# Altium PCB Copy of UniversalBoard.PcbDoc (part 1 of 2)
Units mm, origin at the board's own origin, x right, y up, seen from the top; angles counter-clockwise.
Board outline 150 x 100 mm, 2 copper layers (Top Layer, Bottom Layer); 74 components, 82 nets, 428 pads, 86 vias.
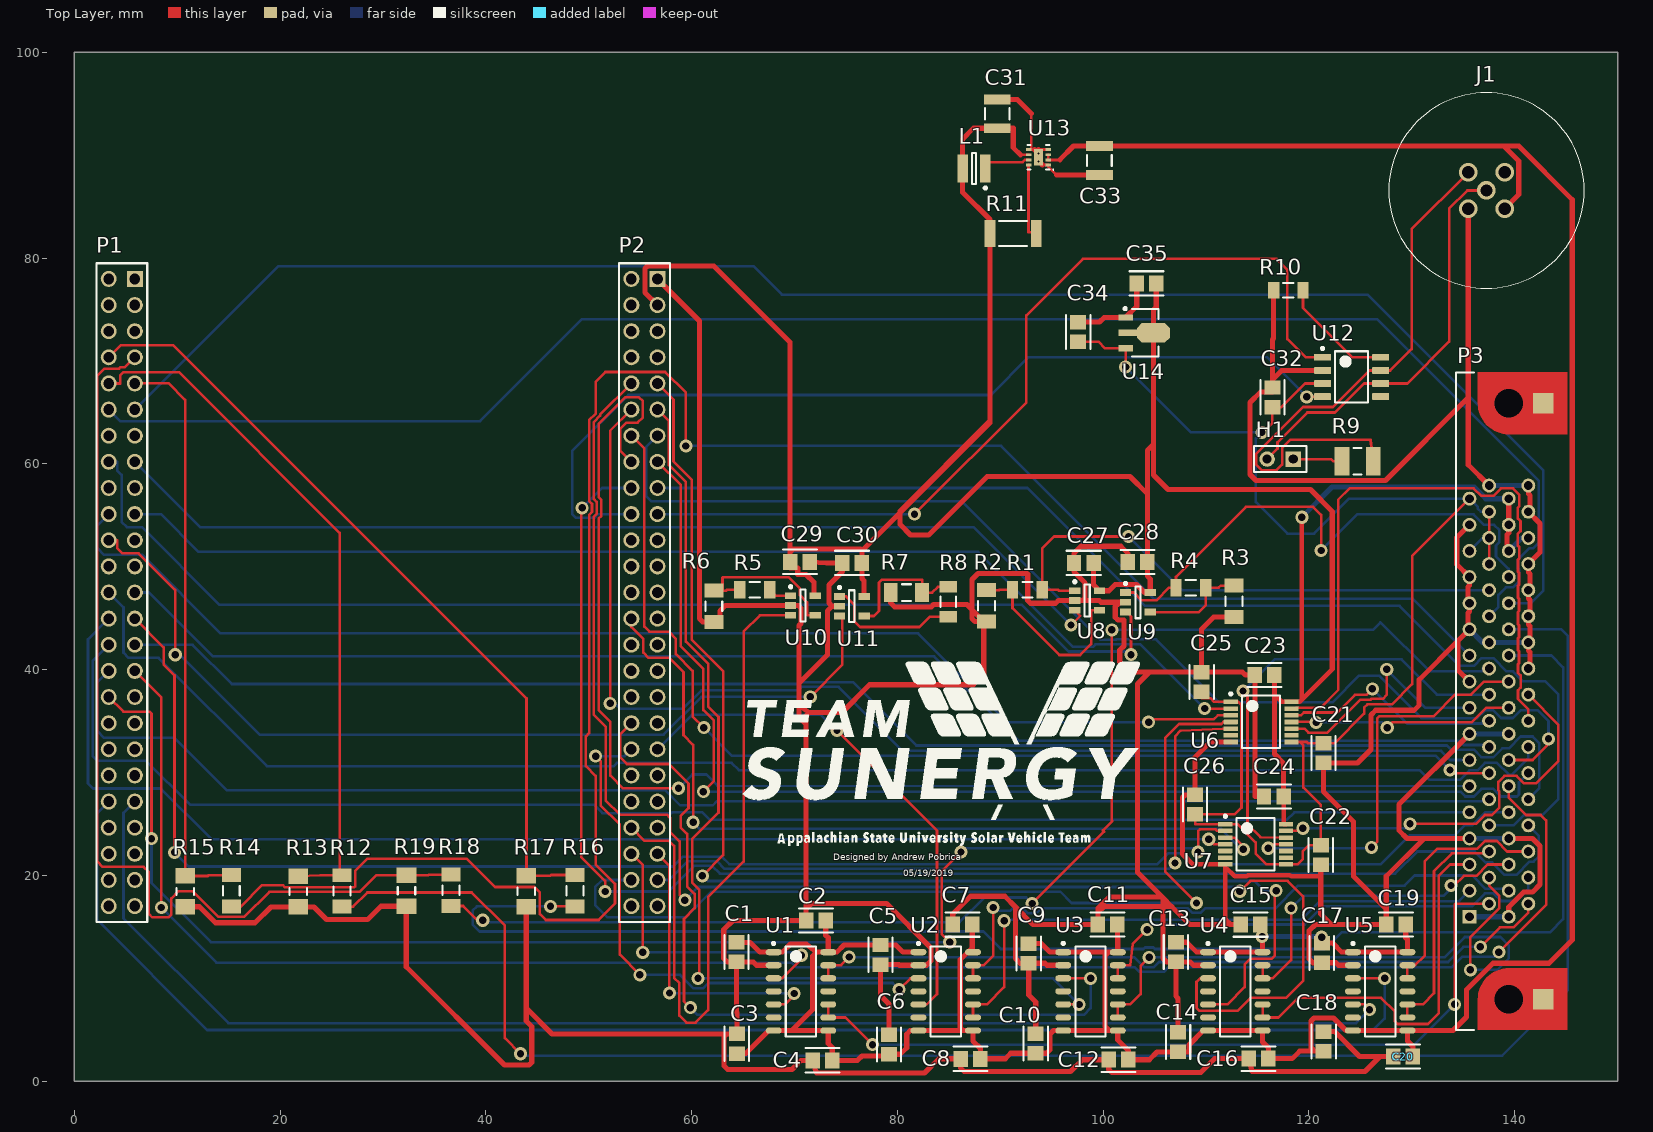
[diagram p0: Top Layer view]
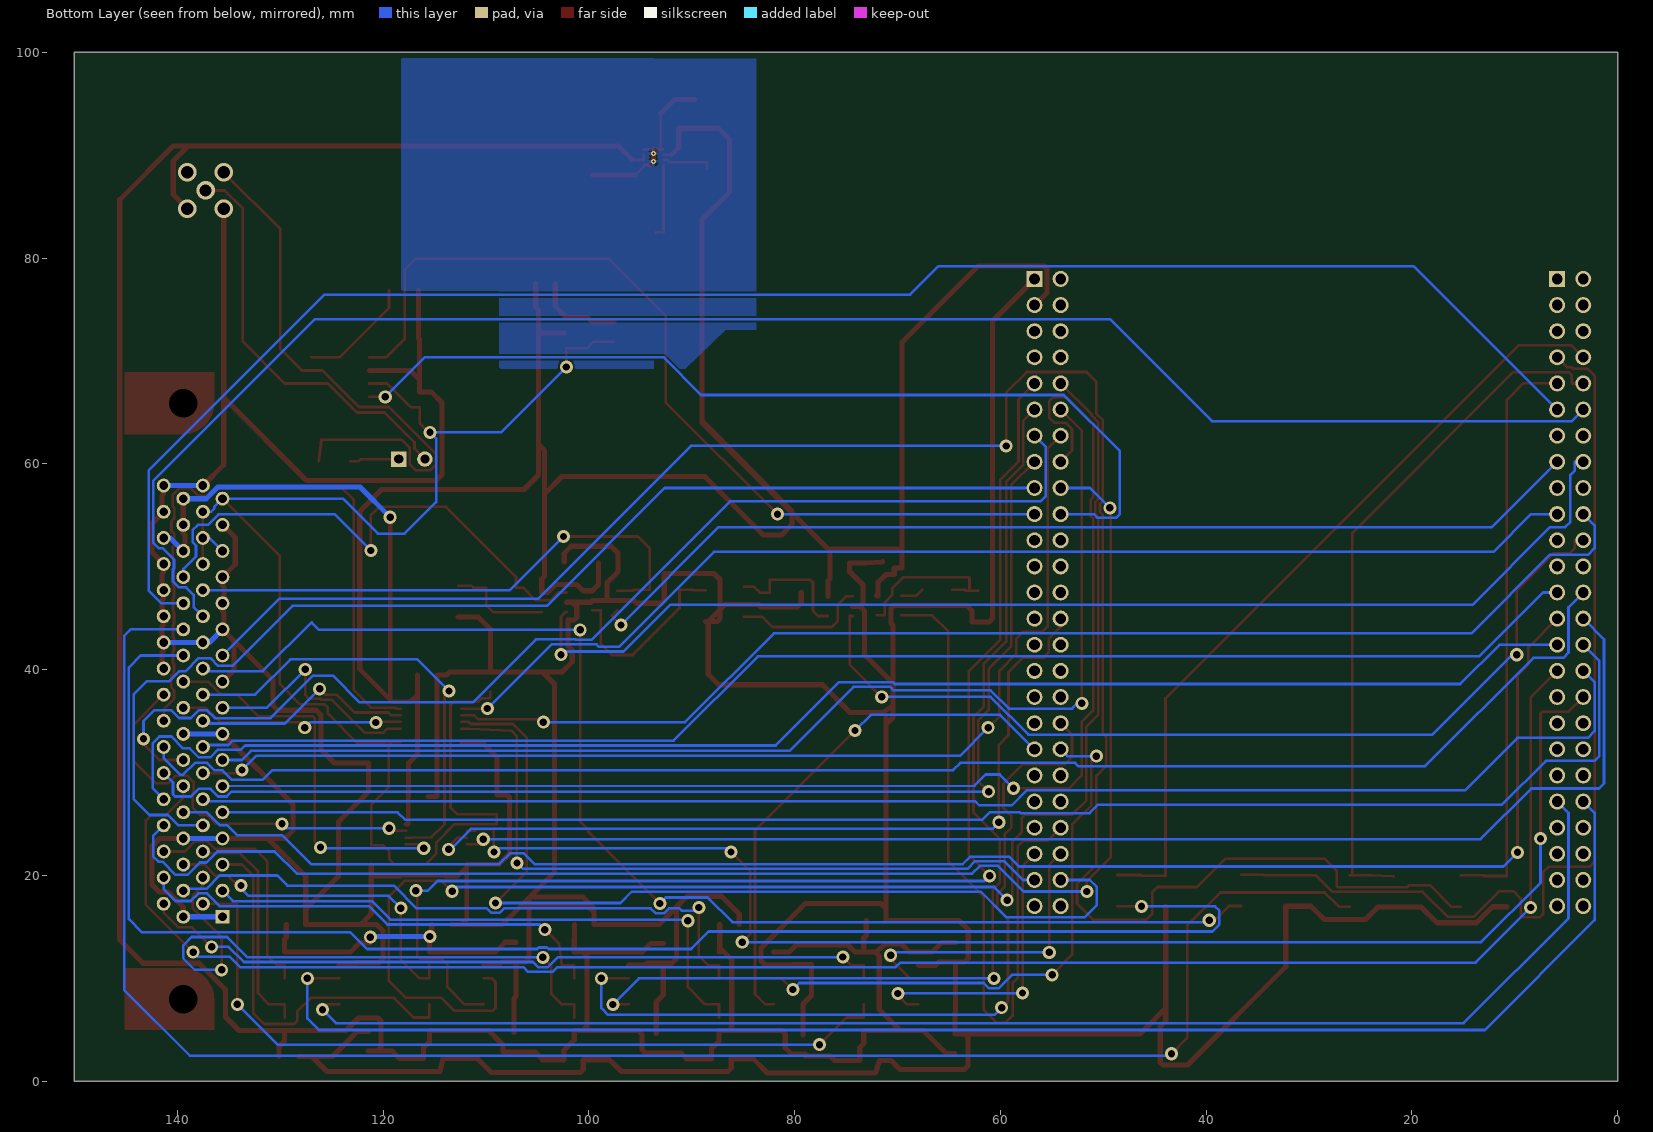
[diagram p1: Bottom Layer view, seen from below]

## Layer stack, top to bottom
Top Solder: solder mask 0.0102, Solder Resist, Dk 3.5
Top Layer: signal copper 0.0356
Dielectric 1: dielectric 0.32, FR-4, Dk 4.8
Bottom Layer: signal copper 0.0356
Bottom Solder: solder mask 0.0102, Solder Resist, Dk 3.5

## Board outline
0,0 150,0 150,100 0,100

## Design rules (kind name [scope] priority, off if disabled: settings)
Clearance "Stitching No Net_1" [IsStitchingVia and InNet('No Net') vs (IsVia and (Not IsStitchingVia)) Or IsPad] p1: gap=0.127 ignorepadtopadclearanceinfootprint=FALSE
Clearance "Stitching No Net" [IsStitchingVia and InNet('No Net') vs (IsVia and (Not IsStitchingVia)) Or IsPad] p2: gap=0.127 ignorepadtopadclearanceinfootprint=FALSE
Clearance [All] p3: gap=0.2 ignorepadtopadclearanceinfootprint=FALSE except(0: Arc-Hole Track-Hole SMDPad-Hole THPad-Hole Via-Hole Fill-Hole Poly-Hole Region-Hole Text-Hole)
ComponentClearance [All] p1: gap=0.2 collisioncheckmode=3 verticalgap=0.2 showdistances=FALSE
DiffPairsRouting [All] p1: maxlimit=0.2 minlimit=0.2 mostfreqgap=0.2 toplayer_minwidth=0.381 toplayer_maxwidth=0.381 toplayer_prefwidth=0.381 bottomlayer_minwidth=0.381 bottomlayer_maxwidth=0.381 bottomlayer_prefwidth=0.381 maxuncoupledlength=12.7
HoleSize [All] p1: absolutevalues=TRUE maxlimit=2.75 minlimit=0.025 maxpercent=80.000 minpercent=20.000
MinimumSolderMaskSliver [All] p1: minsoldermaskwidth=0.1
PolygonConnect [All] p1: connectstyle=Relief reliefconductorwidth=0.254 reliefentries=4 polygonreliefangle="90 Angle" airgapwidth=0.254
RoomDefinition Power_CAN [InComponentClass('Power_CAN')] p1: confinementstyle=ConfineIn formatcopy=TRUE lockcomponents=FALSE outline 82.24,57.23 152.35,57.23 152.35,101.48 82.24,101.48
RoomDefinition output_header [InComponentClass('output_header')] p2: confinementstyle=ConfineIn formatcopy=TRUE lockcomponents=FALSE outline 151.98,70.26 133.95,70.26 133.95,3.31 151.98,3.31
RoomDefinition DAC_PWW_Outputs [InComponentClass('DAC_PWW_Outputs')] p3: confinementstyle=ConfineIn formatcopy=TRUE lockcomponents=FALSE outline 59.5,41.2 130.694,41.2 130.694,54.53 59.5,54.53
RoomDefinition Analog_inputs [InComponentClass('Analog_inputs')] p4: confinementstyle=ConfineIn formatcopy=TRUE lockcomponents=FALSE outline 7.42,15.61 52.75,15.61 52.75,23.98 7.42,23.98
RoomDefinition 12vOutputs [InComponentClass('12vOutputs')] p5: confinementstyle=ConfineIn formatcopy=TRUE lockcomponents=FALSE outline 62.78,0.32 133.42,0.32 133.42,18.577 62.78,18.577
RoomDefinition 5vOutputs [InComponentClass('5vOutputs')] p6: confinementstyle=ConfineIn formatcopy=TRUE lockcomponents=FALSE outline 104.92,19.5 127.25,19.5 127.25,41.19 104.92,41.19
RoutingVias [All] p1: holewidth=0.711 width=1.27 viastyle="Through Hole" minholewidth=0.711 minwidth=1.27 maxholewidth=0.711 maxwidth=1.27
SMDNeckDown [(InNet('+5') OR InNet('+12') OR InNet('GND'))] p1: percent=100.000
SilkToSilkClearance [All] p1: silktosilkclearance=0.2
SilkToSolderMaskClearance [IsPad] p1: minsilkscreentomaskgap=0.2 clearancetoexposedcopper=TRUE
SolderMaskExpansion [All] p1: expansion=0.102
Width 12V [InNet('+12')] p1: maxlimit=0.5 minlimit=0.254 preferedwidth=0.5 minimp=50.000000 maximp=50.000000 favimp=50.000000
Width 5V [InNet('+5')] p2: maxlimit=0.5 minlimit=0.254 preferedwidth=0.5 minimp=50.000000 maximp=50.000000 favimp=50.000000
Width GND [InNet('GND')] p3: maxlimit=0.5 minlimit=0.254 preferedwidth=0.5 minimp=50.000000 maximp=50.000000 favimp=50.000000
Width All [All] p4: maxlimit=0.254 minlimit=0.254 preferedwidth=0.254
24 further rules are at their usual default settings.

## Classes and differential pairs
component class Power_CAN: C31 C32 C33 C34 C35 C? H1 H? J1 J? L1 L? R9 R10 R11 U12 U13 U14
component class output_header: P3 P?
component class DAC_PWW_Outputs: C27 C28 C29 C30 C? R1 R2 R3 R4 R5 R6 R7 R8 U8 U9 U10 U11
component class Analog_inputs: R12 R13 R14 R15 R16 R17 R18 R19
component class 12vOutputs: C1 C2 C3 C4 C5 C6 C7 C8 C9 C10 C11 C12 C13 C14 C15 C16 C17 C18 C19 C20 U1 U2 U3 U4 U5
component class 5vOutputs: C21 C22 C23 C24 C25 C26 C? U6 U7

## Components (designator, comment, footprint, x,y, rotation, side; value= is the part's Value field where it differs from the comment)
C1 "C0603C104K5RACTU" Kemet_C0805_IPC_A 64.35,12.54 r270 top
C2 "C0603C104K5RACTU" Kemet_C0805_IPC_A 72.08,15.62 r180 top
C3 "C0603C104K5RACTU" Kemet_C0805_IPC_A 64.39,3.641 r90 top
C4 "C0603C104K5RACTU" Kemet_C0805_IPC_A 72.71,2.03 r180 top
C5 "C0603C104K5RACTU" Kemet_C0805_IPC_A 78.35,12.29 r270 top
C6 "C0603C104K5RACTU" Kemet_C0805_IPC_A 79.18,3.57 r90 top
C7 "C0603C104K5RACTU" Kemet_C0805_IPC_A 86.32,15.22 r180 top
C8 "C0603C104K5RACTU" Kemet_C0805_IPC_A 87.11,2.18 r180 top
C9 "C0603C104K5RACTU" Kemet_C0805_IPC_A 92.76,12.42 r270 top
C10 "C0603C104K5RACTU" Kemet_C0805_IPC_A 93.44,3.67 r90 top
C11 "C0603C104K5RACTU" Kemet_C0805_IPC_A 100.43,15.24 r180 top
C12 "C0603C104K5RACTU" Kemet_C0805_IPC_A 101.49,2.09 r180 top
C13 "C0603C104K5RACTU" Kemet_C0805_IPC_A 107.06,12.55 r270 top
C14 "C0603C104K5RACTU" Kemet_C0805_IPC_A 107.28,3.8 r90 top
C15 "C0603C104K5RACTU" Kemet_C0805_IPC_A 114.31,15.22 r180 top
C16 "C0603C104K5RACTU" Kemet_C0805_IPC_A 115.11,2.19 r180 top
C17 "C0603C104K5RACTU" Kemet_C0805_IPC_A 121.25,12.47 r270 top
C18 "C0603C104K5RACTU" Kemet_C0805_IPC_A 121.43,3.87 r90 top
C19 "C0603C104K5RACTU" Kemet_C0805_IPC_A 128.46,15.24 r180 top
C20 "C0603C104K5RACTU" Kemet_C0805_IPC_A 129.15,2.4 r180 top
C21 "C0603C104K5RACTU" Kemet_C0805_IPC_A 121.41,31.89 r270 top
C22 "C0603C104K5RACTU" Kemet_C0805_IPC_A 121.15,21.97 r270 top
C23 "C0603C104K5RACTU" Kemet_C0805_IPC_A 115.69,39.473 r180 top
C24 "C0603C104K5RACTU" Kemet_C0805_IPC_A 116.58,27.67 r180 top
C25 "C0603C104K5RACTU" Kemet_C0805_IPC_A 109.57,38.82 r90 top
C26 "C0603C104K5RACTU" Kemet_C0805_IPC_A 108.93,26.88 r90 top
C27 "C0603C104K5RACTU" Kemet_C0805_IPC_A 98.11,50.38 r180 top
C28 "C0603C104K5RACTU" Kemet_C0805_IPC_A 103.34,50.46 r180 top
C29 "C0603C104K5RACTU" Kemet_C0805_IPC_A 70.517,50.483 r180 top
C30 "C0603C104K5RACTU" Kemet_C0805_IPC_A 75.601,50.38 r180 top
C31 "CAP 22uF 16V X7R 1210(3225)" CAPC1210(3225)280_L 89.7,94.02 r90 top value=22uF
C32 "C0603C104K5RACTU" Kemet_C0805_IPC_A 116.447,66.477 r90 top
C33 "CAP 22uF 16V X7R 1210(3225)" CAPC1210(3225)280_L 99.63,89.49 r270 top value=22uF
C34 "C0805C105K4RACTU" Kemet_C0805_IPC_A 97.57,72.83 r270 top
C35 "C0805C105K4RACTU" Kemet_C0805_IPC_A 104.207,77.547 r0 top
H1 "Header 0" HDR1X2 118.47,60.47 r180 top
J1 "1542761" 1542761 137.252,86.578 r135 top
L1 "SRN3015-2R2M" BOUR-SRN3015-2_V 87.44,88.72 r180 top
P1 "SSW-125-01-F-D" SMTC-SSW-125-01-X-D 5.878,77.981 r270 top
P2 "SSW-125-01-F-D" SMTC-SSW-125-01-X-D 56.678,77.981 r270 top
P3 "2-5174225-5" TECO-2-5174225-5-68_V 138.462,36.935 r90 top
R1 "CRCW1206523RFKEA" RESC3216X60X45NL10T20 92.638,47.77 r180 top
R2 "CRCW12061K00FKEA" RESC3216X60X45ML15T20 88.638,46.21 r270 top
R3 "CRCW12061K00FKEA" RESC3216X60X45ML15T20 112.7,46.65 r270 top
R4 "CRCW1206523RFKEA" RESC3216X60X45NL10T20 108.52,47.97 r0 top
R5 "CRCW1206523RFKEA" RESC3216X60X45NL10T20 66.128,47.78 r180 top
R6 "CRCW12061K00FKEA" RESC3216X60X45ML15T20 62.148,46.16 r270 top
R7 "CRCW12061K00FKEA" RESC3216X60X45ML15T20 80.873,47.48 r180 top
R8 "CRCW1206523RFKEA" RESC3216X60X45NL10T20 84.923,46.6 r90 top
R9 "ERJ-14YJ121U" RESC3225X70X50ML20T20 124.72,60.26 r180 top
R10 "ERJ-8GEYJ103V" RESC3216X70X50NL05T20 117.99,76.88 r180 top
R11 "100K 5% 2010(5025)" RESC2010(5025)_L 91.24,82.4 r0 top value="100000.00 Ohm"
R12 "CRCW12064K70FKEA" RESC3216X60X45ML15T20 26.03,18.49 r270 top
R13 "ERA8AEB912V" RESC3216X70X50ML20T25 21.78,18.44 r270 top
R14 "CRCW12064K70FKEA" RESC3216X60X45ML15T20 15.25,18.5 r270 top
R15 "ERA8AEB912V" RESC3216X70X50ML20T25 10.77,18.45 r270 top
R16 "CRCW12064K70FKEA" RESC3216X60X45ML15T20 48.65,18.52 r270 top
R17 "ERA8AEB912V" RESC3216X70X50ML20T25 43.94,18.47 r270 top
R18 "CRCW12064K70FKEA" RESC3216X60X45ML15T20 36.6,18.56 r270 top
R19 "ERA8AEB912V" RESC3216X70X50ML20T25 32.28,18.51 r270 top
U1 "BTS4160DGA" INF-PG-DSO-14-37_N 70.62,8.732 r0 top
U2 "BTS4160DGA" INF-PG-DSO-14-37_N 84.694,8.732 r0 top
U3 "BTS4160DGA" INF-PG-DSO-14-37_N 98.769,8.732 r0 top
U4 "BTS4160DGA" INF-PG-DSO-14-37_N 112.843,8.732 r0 top
U5 "BTS4160DGA" INF-PG-DSO-14-37_N 126.917,8.732 r0 top
U6 "TXB0104PWR" PW0014A_Custom 115.35,34.92 r0 top
U7 "TXB0104PWR" PW0014A_Custom 114.82,23.03 r0 top
U8 "MCP6001T-I/OT" SOT-23-OT5_CUSTOM 98.439,46.72 r0 top
U9 "MCP6001T-I/OT" SOT-23-OT5_CUSTOM 103.369,46.55 r0 top
U10 "MCP6001T-I/OT" SOT-23-OT5_CUSTOM 70.812,46.23 r0 top
U11 "MCP6001T-I/OT" SOT-23-OT5_CUSTOM 75.561,46.17 r0 top
U12 "SN65HVD230D" D0008A_M 124.15,68.448 r0 top
U13 "TPS62173DSGR" DSG8-1600X900TP 93.708,89.803 r180 top
U14 "MCP1702T-3302E/MB" SOT-89-MB3_N 104.08,72.74 r0 top

## Footprints (in the part's own frame and the unit in brackets; to place one, negate y for a bottom-side part, rotate by r counter-clockwise, add the part's x,y. Pads: shape width x height; smd on the part's side, far side on the other; paste and mask are expansions set on the pad)
1542761 [mm]
  round 1.8 hole 1.2: 1(0,-2.5) 2(-2.5,0) 3(0,2.5) 4(2.5,0) 5(0,0)
  silkscreen extent -9.5,-9.5 9.5,9.5
BOUR-SRN3015-2_V [mm] "SMD, 2-Leads, Body 3x3mm, Height 1.5mm"
  rect 1x2.7 smd: 1(-1.1,0) 2(1.1,0)
  silkscreen extent -1.23,-1.5 0.2,2.02, body extent -1.5,-1.5 1.5,1.5, height 1.5
CAPC1210(3225)280_L [mm] "Chip Capacitor, Body 3.2x2.5mm, Height 2.8mm, IPC High Density"
  rect 0.95x2.6 smd: 1(-1.4,0) 2(1.4,0)
  silkscreen extent -0.55,-1.2 0.55,1.2, body extent -1.7,-1.4 1.7,1.4, height 2.8
D0008A_M [mm] "SOIC, 8-Leads, Body 5x4mm, Pitch 1.27mm, IPC Low Density"
  rrect15% 1.65x0.65 smd: 1(-2.825,1.905) 2(-2.825,0.635) 3(-2.825,-0.635) 4(-2.825,-1.905) 5(2.825,-1.905) 6(2.825,-0.635) 7(2.825,0.635) 8(2.825,1.905)
  silkscreen extent -2.95,-2.5 1.6,2.9, body extent -3,-2.45 3,2.45, height 1.63
DSG8-1600X900TP [mm] "SON, 8-Leads, Body 2x2mm, Pitch 0.5mm, Thermal Pad 1.6x0.9mm, TI Recommended"
  rect 0.5x0.28 smd paste-0.14 mask+0.051: 1(-0.95,0.75) 2(-0.95,0.25) 3(-0.95,-0.25) 4(-0.95,-0.75) 5(0.95,-0.75) 6(0.95,-0.25) 7(0.95,0.25) 8(0.95,0.75)
  rect 0.9x1.6 smd paste-0.45 mask+0.051: 9(0,0)
  silkscreen extent -1.5,-1.2 1.05,1.25, body extent -1.05,-1.05 1.05,1.05, height 0.8
HDR1X2 [mm] "Connector; Header; 2 Position"
  rect 1.5x1.5 hole 0.9: 1(0,0)
  round 1.5 hole 0.9: 2(2.54,0)
  silkscreen extent -1.27,-1.27 3.81,1.27
INF-PG-DSO-14-37_N [mm] "SOP, 14-Leads, Body 8.65x3.9mm, Pitch 1.27mm, IPC Medium Density"
  oval 1.55x0.6 smd: 1(-2.65,3.81) 2(-2.65,2.54) 3(-2.65,1.27) 4(-2.65,0) 5(-2.65,-1.27) 6(-2.65,-2.54) 7(-2.65,-3.81) 8(2.65,-3.81) 9(2.65,-2.54) 10(2.65,-1.27) 11(2.65,0) 12(2.65,1.27) 13(2.65,2.54) 14(2.65,3.81)
  silkscreen extent -2.77,-4.37 1.48,4.78, body extent -2,-4.38 2,4.38, height 1.75
Kemet_C0805_IPC_A [mm]
  rect 1.405x1.556 smd paste+0 mask+0: 1(-0.951,0) 2(0.951,0)
  silkscreen extent -1.65,-1.18 1.65,1.18
PW0014A_Custom [mm] "SOP, 14-Leads, Body 5.1x4.5mm, Pitch 0.65mm, IPC Medium Density"
  rrect22% 1.4x0.45 smd mask+0.048: 1(-2.95,1.95) 2(-2.95,1.3) 3(-2.95,0.65) 4(-2.95,0) 5(-2.95,-0.65) 6(-2.95,-1.3) 7(-2.95,-1.95) 8(2.95,-1.95) 9(2.95,-1.3) 10(2.95,-0.65) 11(2.95,0) 12(2.95,0.65) 13(2.95,1.3) 14(2.95,1.95)
  silkscreen extent -3.07,-2.55 1.85,2.85, body extent -3.21,-2.5 3.21,2.5, height 1
RESC2010(5025)_L [mm] "Chip Resistor, Body 5.0x2.5mm, IPC High Density"
  rect 1.05x2.6 smd: 1(-2.25,0) 2(2.25,0)
  silkscreen extent -1.35,-1.2 1.35,1.2, body extent -2.6,-1.35 2.6,1.35, height 0.71
RESC3216X60X45ML15T20 [mm] "Chip Resistor, 2-Leads, Body 3.3x1.75mm, IPC Low Density"
  rect 1.35x1.85 smd: 1(-1.525,0) 2(1.525,0)
  silkscreen extent -0.45,-0.83 0.45,0.82, body extent -1.65,-0.87 1.65,0.87, height 0.6
RESC3216X60X45NL10T20 [mm] "Chip Resistor, 2-Leads, Body 3.20x1.60mm, IPC Medium Density"
  rect 1.1x1.7 smd: 1(-1.45,0) 2(1.45,0)
  silkscreen extent -0.5,-0.75 0.5,0.75, body extent -1.65,-0.85 1.65,0.85, height 0.6
RESC3216X70X50ML20T25 [mm] "Chip Resistor, 2-Leads, Body 3.20x1.60mm, IPC Low Density"
  rect 1.5x1.9 smd: 1(-1.5,0) 2(1.5,0)
  silkscreen extent -0.35,-0.85 0.35,0.85, body extent -1.7,-0.9 1.7,0.9, height 0.7
RESC3216X70X50NL05T20 [mm] "Chip Resistor, 2-Leads, Body 3.20x1.60mm, IPC Medium Density"
  rect 1.1x1.65 smd: 1(-1.425,0) 2(1.425,0)
  silkscreen extent -0.5,-0.73 0.5,0.73, body extent -1.63,-0.82 1.62,0.82, height 0.7
RESC3225X70X50ML20T20 [mm] "Chip Resistor, 2-Leads, Body 3.20x2.50mm, IPC Low Density"
  rect 1.45x2.8 smd: 1(-1.525,0) 2(1.525,0)
  silkscreen extent -0.4,-1.3 0.4,1.3, body extent -1.7,-1.35 1.7,1.35, height 0.7
SMTC-SSW-125-01-X-D [mm] "SQ Post Socket, 2x25 Pins, Vertical, 2.54mm Pitch, Female"
  rect 1.55x1.55 hole 1.04: 1(0,0)
  round 1.55 hole 1.04: 2(0,-2.54) 3(2.54,0) 4(2.54,-2.54) 5(5.08,0) 6(5.08,-2.54) 7(7.62,0) 8(7.62,-2.54) 9(10.16,0) 10(10.16,-2.54) 11(12.7,0) 12(12.7,-2.54) 13(15.24,0) 14(15.24,-2.54) 15(17.78,0) 16(17.78,-2.54) 17(20.32,0) 18(20.32,-2.54) 19(22.86,0) 20(22.86,-2.54) 21(25.4,0) 22(25.4,-2.54) 23(27.94,0) 24(27.94,-2.54) 25(30.48,0) 26(30.48,-2.54) 27(33.02,0) 28(33.02,-2.54) 29(35.56,0) 30(35.56,-2.54) 31(38.1,0) 32(38.1,-2.54) 33(40.64,0) 34(40.64,-2.54) 35(43.18,0) 36(43.18,-2.54) 37(45.72,0) 38(45.72,-2.54) 39(48.26,0) 40(48.26,-2.54) 41(50.8,0) 42(50.8,-2.54) 43(53.34,0) 44(53.34,-2.54) 45(55.88,0) 46(55.88,-2.54) 47(58.42,0) 48(58.42,-2.54) 49(60.96,0) 50(60.96,-2.54)
  silkscreen extent -1.52,-3.75 62.48,1.2, body extent -1.52,-3.75 62.48,1.21, height 8.41
SOT-23-OT5_CUSTOM [mm] "SOT23, 5-Leads, Body 2.9x1.7mm, Pitch 0.95mm, Lead Span 2.8mm, IPC Medium Density"
  rect 1.1x0.65 smd mask+0.051: 1(-1.2,0.95) 2(-1.2,0) 3(-1.2,-0.95)
  rect 1.1x0.65 smd: 4(1.2,-0.95)
  rect 1.1x0.65 smd mask+0.102: 5(1.2,0.95)
  silkscreen extent -1.32,-1.55 0.25,1.95, body extent -0.9,-1.55 0.9,1.55, height 1.45
SOT-89-MB3_N [mm] "SOT89, 3-Leads, Body 4.5x2.4 mm, Pitch 1.5mm, Lead Span 4.1mm, IPC Medium Density"
  rect 1.4x0.6 smd: 1(-1.9,1.5) 3(-1.9,-1.5)
  rect 1.8x0.6 smd: 2(-1.7,0)
  oct 3.2x1.9 smd: 2(0.8,0)
  silkscreen extent -2.07,-2.3 1.3,2.47, body extent -1.3,-2.3 1.3,2.3, height 1.6
TECO-2-5174225-5-68_V [mm] "Connector, 68-Leads, Pitch 2.54mm"
  rect 1.35x1.35 hole 0.85: 1(-20.955,2.858)
  round 1.35 hole 0.85: 2(-19.685,0.952) 3(-18.415,2.858) 4(-17.145,0.952) 5(-15.875,2.858) 6(-14.605,0.952) 7(-13.335,2.858) 8(-12.065,0.952) 9(-10.795,2.858) 10(-9.525,0.952) 11(-8.255,2.858) 12(-6.985,0.952) 13(-5.715,2.858) 14(-4.445,0.952) 15(-3.175,2.858) 16(-1.905,0.952) 17(-0.635,2.858) 18(0.635,0.952) 19(1.905,2.858) 20(3.175,0.952) 21(4.445,2.858) 22(5.715,0.952) 23(6.985,2.858) 24(8.255,0.952) 25(9.525,2.858) 26(10.795,0.952) 27(12.065,2.858) 28(13.335,0.952) 29(14.605,2.858) 30(15.875,0.952) 31(17.145,2.858) 32(18.415,0.952) 33(19.685,2.858) 34(20.955,0.952) 35(-20.955,-0.952) 36(-19.685,-2.858) 37(-18.415,-0.952) 38(-17.145,-2.858) 39(-15.875,-0.952) 40(-14.605,-2.858) 41(-13.335,-0.952) 42(-12.065,-2.858) 43(-10.795,-0.952) 44(-9.525,-2.858) 45(-8.255,-0.952) 46(-6.985,-2.858) 47(-5.715,-0.952) 48(-4.445,-2.858) 49(-3.175,-0.952) 50(-1.905,-2.858) 51(-0.635,-0.952) 52(0.635,-2.858) 53(1.905,-0.952) 54(3.175,-2.858) 55(4.445,-0.952) 56(5.715,-2.858) 57(6.985,-0.952) 58(8.255,-2.858) 59(9.525,-0.952) 60(10.795,-2.858) 61(12.065,-0.952) 62(13.335,-2.858) 63(14.605,-0.952) 64(15.875,-2.858) 65(17.145,-0.952) 66(18.415,-2.858) 67(19.685,-0.952) 68(20.955,-2.858)
  rect 2x2 smd: MP1(-28.956,-4.318) MP2(28.956,-4.318)
  round 0 hole 2.75 unplated: ""(-28.955,-0.952) ""(28.955,-0.952)
  Top Layer region: 31.955,2.047 31.955,-6.658 25.955,-6.658 25.955,-0.953 26.357,0.547 27.455,1.645 28.955,2.047 28.955,2.047
  Top Layer region: -31.955,2.047 -31.955,-6.658 -25.955,-6.658 -25.955,-0.953 -26.357,0.547 -27.455,1.645 -28.955,2.047 -28.955,2.047
  silkscreen extent -31.95,2.45 31.96,4.19, body extent -31.95,-13.36 31.96,4.14, height 9.51

## Part data
C31 C33: library part CMP-1038-02277-1, "CAP 22uF 16V ±10% 1210 (3225 Metric) Thickness 2.8mm SMD", Case-EIA=1210, Case-Metric=3225, Rated Voltage="16 V", Tolerance=±10%, Max Thickness="2.8 mm", Technology=SMT
H1: library part "Header 2", "Header, 2-Pin", LatestRevisionDate=17-Jul-2002, LatestRevisionNote="Re-released for DXP Platform.", Publisher="Altium Limited"
J1: "Connector", Manufacturer_Name="Phoenix Contact", Mouser Part Number=651-1542761, RS Part Number=8025583, Allied_Number=70170366, Allied Price/Stock=https://www.alliedelec.com/phoenixcontact-1542761/70170366/, Datasheet Link=https://media.digikey.com/PDF/Data%20Sheets/Phoenix%20Contact%20PDFs/1542761.pdf, Height=18mm, Manufacturer_Part_Number=1542761, Mouser Price/Stock=https://www.mouser.com/Search/Refine.aspx?Keyword=651-1542761, RS Price/Stock=http://uk.rs-online.com/web/p/products/8025583
L1: library part CMP-0007-00003-1, "Semi-shielded Power Inductor, 2.2 uH, +/- 20%, 1.8 A, -40 to 125 degC, 3 x 3 x 1.5 mm SMD, RoHS and Halogen Free, Tape and Reel", Inductance="2.2 uH", Inductance tolerance="+/- 20%", Manufacturer=Bourns, Operating Temperature="-40 to 125 degC", Rated Current="1.8 A", Resistance to Solder Heat="+260 degC for 10 sec.", ComponentLink1Description="Manufacturer URL", ComponentLink1URL=http://www.bourns.com/, ComponentLink2Description=Datasheet, ComponentLink2URL=http://www.bourns.com/data/global/pdfs/SRN3015.pdf, ComponentLink3Description="Package Specification", ComponentLink3URL=http://www.bourns.com/data/global/pdfs/SRN3015.pdf, DatasheetVersion=Aug-11, DCR Max="0.072 Ohm", Isat="1.65 A", Mounting Technology="Surface Mount", PackageDescription="2-Pin SMD, Body 3 x 3 mm, Height 1.5 mm", PackageReference=SRN3015, Packing="Tape and Reel", PartNumber=SRN3015-2R2M, RoHS=TRUE, SRF Min="90 MHz"
P1 P2: library part CMP-1023-00476-1, "SQ Post Socket, Through-hole, Vertical, -55 to 125 degC, 2.54 mm Pitch, 50-Pin, Female, RoHS", Manufacturer=Samtec, Temperature Range="-55 to 125 degC", ComponentLink1Description="Manufacturer URL", ComponentLink1URL=http://www.samtec.com, ComponentLink2Description=Datasheet, ComponentLink2URL=http://www.samtec.com/documents/webfiles/pdf/SSW_TH.PDF, ComponentLink3Description="Package Specification", ComponentLink3URL=http://www.samtec.com/documents/webfiles/cpdf/SSW-1XX-XX-XXX-X-XX-XXX-XX-MKT.pdf, DatasheetVersion=F-214, Mounting Technology=Through-hole, Orientation=Vertical, PackageDescription="Assembly, Socket Strip .016 X .031 Tail", PackageReference=SSW-125-01-X-D, PackageVersion="CA, 6/1987", PartNumber=SSW-125-01-F-D, Pitch="2.54 mm", RoHS=True
P3: library part CMP-2000-05410-1, "Male D-Sub Connector, Pitch 1.27 mm, 2 x 34 Position, Height 10.3 mm, Tail Length 2.1 mm, -55 to 85 degC, RoHS, Tray", Color=Black, Current Rating=1A, Manufacturer="TE Connectivity", Operating Temperature=-55degC~85degC, Package Description="Male D-Sub Connector, Pitch 1.27 mm, 2 x 34 Position, Height 10.3 mm, Tail Length 2.1 mm", Package Reference=2-5174225-5-68, Package Version="Rev. C1, 03/2011", Standard Package=4, Voltage Rating=100V, 3D Model=2-5174225-5.pdf, Category=Connectors,Interconnects, Connector Style=D-Type, Connector Type=Cap,MalePins, Contact Finish=Gold, Contact Finish Thickness=30µin(0.76µm), Contact Type=Signal, Datasheet URL=http://www.te.com.cn/commerce/DocumentDelivery/DDEController?Action=showdoc&DocId=Customer+Drawing%7F5174225%7FC1%7Fpdf%7FEnglish%7FENG_CD_5174225_C1.pdf%7F2-5174225-5, Datasheet Version="Rev. C1, 03/2011", Dynamic Catalog=AMPLIMITE.050IISeries, Family=D-SubConnectors, Featured Product=AMPLIMITED-SubminiatureConnectors, Features=Shielded, Flange Feature=Housing/Shell(M2.5);Latchblocks, Housing Material=PolybutyleneTerephthalate(PBT), Manufacturer URL=http://www.te.com/, Mounting Type=ThroughHole,RightAngle, Number of Positions=68, Number of Rows=2, Other Names=A33476, Package URL=http://www.te.com.cn/commerce/DocumentDelivery/DDEController?Action=showdoc&DocId=Customer+Drawing%7F5174225%7FC1%7Fpdf%7FEnglish%7FENG_CD_5174225_C1.pdf%7F2-5174225-5, Product Training Modules=AMPLIMITED-SubConnectors, RoHS Information=2-5174225-5StatementofCompliance, Series=AMPLIMITE.050II, Shell Material, Finish=Zinc,NickelPlated, Shell Size, Connector Layout=0.050Pitchx0.100RowtoRow, Termination=Solder
R1 R4 R5 R8: library part CMP-2003-02266-1, Manufacturer="Vishay Dale", Part Number=CRCW1206523RFKEA
R2 R3 R6 R7: library part CMP-2100-03616-1, "Chip Resistor, 1 KOhm, +/- 1%, 0.25 W, -55 to 155 degC, 1206 (3216 Metric), RoHS, Tape and Reel", Case/Package=1206, Case Code (Metric)=3216, Manufacturer="Vishay Semiconductor", Max Operating Temperature=155degC, Max Power Dissipation=250mW, Min Operating Temperature=-55degC, Package Description="2-Pin Surface Mount Device, Body 3.15 x 1.6 mm", Package Quantity=10, Package Reference=1206.0, Resistance=1KOhm, Temperature Coefficient=100ppm/degreesC, Tolerance=1%, Voltage Rating=200V, Case Code (Imperial)=1206, Composition=ThickFilm, Contact Plating=Tin, Datasheet URL=http://www.farnell.com/datasheets/1720486.pdf, Datasheet Version=41061.0, Depth=1.6mm, Height=0.55mm, Lead Free=LeadFree, Length=3.2mm, Manufacturer URL=http://www.vishay.com/, Military Standard=Not, Mount=SurfaceMount, Number of Pins=2, Number of Terminations=2, Packaging=TapeandReel, Power Rating=250mW, Radiation Hardening=No, REACH SVHC=Unknown, RoHSCompliant=true, Termination=SMD/SMT, Voltage Rating (DC)=200V, Weight=0.000353oz, Width=0.063inch
R9: library part CMP-2005-03490-1, Manufacturer=Panasonic, Part Number=ERJ-14YJ121U
R10: library part CMP-2003-00545-1, Manufacturer=Panasonic, Part Number=ERJ-8GEYJ103V
R11: library part CMP-1017-00122-1, "100K 0.75W 5% 2010 (5025 Metric)  SMD", Case-EIA=2010, Case-Metric=5025, Power="0.75 W", Tolerance="5 %", Technology=SMT
R12 R14 R16 R18: library part CMP-2100-03618-1, "Chip Resistor, 4.7 KOhm, +/- 1%, 0.25 W, -55 to 155 degC, 1206 (3216 Metric), RoHS, Tape and Reel", Case/Package=1206, Case Code (Metric)=3216, Manufacturer="Vishay Semiconductor", Max Operating Temperature=155degC, Max Power Dissipation=250mW, Min Operating Temperature=-55degC, Package Description="2-Pin Surface Mount Device, Body 3.15 x 1.6 mm", Package Quantity=10, Package Reference=1206.0, Resistance=4.7KOhm, Temperature Coefficient=100ppm/degreesC, Tolerance=1%, Voltage Rating=200V, Case Code (Imperial)=1206, Composition=ThickFilm, Contact Plating=Tin, Datasheet URL=http://www.vishay.com/docs/20035/dcrcwe3.pdf, Datasheet Version=41061.0, Depth=1.6mm, Height=0.55mm, Lead Free=LeadFree, Length=3.2mm, Manufacturer URL=http://www.vishay.com/, Military Standard=Not, Mount=SurfaceMount, Number of Terminations=2, Packaging=TapeandReel, Power Rating=250mW, Radiation Hardening=No, REACH SVHC=Unknown, RoHSCompliant=true, Termination=SMD/SMT, Voltage Rating (DC)=200V, Weight=0.000353oz, Width=1.6mm
R13 R15 R17 R19: library part CMP-2003-00013-1, Manufacturer=Panasonic, Part Number=ERA8AEB912V
U1 U2 U3 U4 U5: "Smart High-Side Power Switch, 2 Channels, 1.7 A Load Current, -40 to 150 degC, PG-DSO-14-37, Reel, Green", Load Current (typ)="1.7 A", Manufacturer=Infineon, Recommended Operating Voltage Max.="20 V", Recommended Operating Voltage Min.="5.5 V", Channels=2, ComponentLink1Description="Manufacturer URL", ComponentLink1URL=http://www.infineon.com/, ComponentLink2Description=Datasheet, ComponentLink2URL=http://www.infineon.com/dgdl/BTS+4160DGA_DS2008_03_18_neu.pdf?folderId=db3a304314dca389011537739e37155f&fileId=db3a30431a5c32f2011a957ab5875685&sId=db3a30433d68e984013d7cba76cc57cb, ComponentLink3Description="Package Specification", ComponentLink3URL=http://www.infineon.com/dgdl/BTS723GWDS11_2007_09_25.pdf?folderId=db3a304314dca389011537739e37155f&fileId=db3a304331c8f8560131dbfec21b0da9&sId=db3a30443d67b5ca013d854df2f133e5, DatasheetVersion="Rev. 1.0", Green=TRUE, Group="Automotive Qualified", Halogen-free=TRUE, Mounting Technology="Surface Mount", PackageDescription="14-Pin Plastic (Green) Dual Small Outline Package, 8.65 x 3.9 mm Body, 1.27 mm Pitch", PackageReference=PG-DSO-14-37, PackageVersion=Sep-07, Packing=Reel, PartNumber=BTS4160DGA, Ptot (max)="1.4 W", RON(max) @ 150degreesC="320 mOhm", RON @ 25degreesC="160 mOhm", toff (max)="270 us", ton (max)="250 us"
U6 U7: library part TI-TXB0104-TSSOP_PW-14, "4-Bit Bidirectional Voltage-Level Translator with Automatic Direction Sensing and +/- 15-kV ESD Protection, -40 to 85 degC, 14-Pin TSSOP (PW), Green (RoHS & Sb/Br), Tape and Reel", Manufacturer="Texas Instruments", Operating Temperature=-40°C~85°C, Package / Case="14-TSSOP(0.173\",4.40mmWidth)", Package Description="14-Pin Thin Shrink Small Outline Package, Body 5 x 4.4 mm, Pitch 0.65 mm", Package Reference=PW14, Standard Package=1, Supplier Device Package=14-TSSOP, Voltage - Supply=1.2V~3.6V,1.65V~5.5V, Category=IntegratedCircuits(ICs), Data Rate=100Mbps, Datasheet URL=http://www.ti.com/general/docs/lit/getliterature.tsp?genericPartNumber=TXB0104&fileType=pdf, Datasheet Version="Rev. G, 11/2014", Differential - Input=Output:No/No, Dynamic Catalog=TXBSeries, Family=Logic-Translators, Input Type=Logic, Logic Function=Translator,Bidirectional, Manufacturer URL=http://www.ti.com/, Mounting Technology=SurfaceMount, Number of Bits=4, Number of Channels=4, Number of Outputs/Channel=1, Other Names=296-21929-6, Output Type=Logic, Packaging=Digi-Reel®, Product Training Modules=VoltageLevelTranslation, Propagation Delay (Max)=4ns, Series=-
U8 U11: library part CMP-0187-00462-2, "1 MHz, Low-Power Operational Amplifier, 5-Pin SOT-23, Industrial Temperature, Tape and Reel", Code_IPC=SOT23-5, ComponentLink1Description="Manufacturer URL", ComponentLink1URL=http://www.microchip.com/, ComponentLink2Description=Datasheet, ComponentLink2URL=http://ww1.microchip.com/downloads/en/DeviceDoc/21733j.pdf, ComponentLink3Description="Package Specification", ComponentLink3URL=http://www.microchip.com/stellent/groups/techpub_sg/documents/packagingspec/en012702.pdf, DatasheetVersion="revJ, Nov-2009", PackageDescription="5-Lead Plastic Small Outline Transistor (OT) [SOT-23]", PackageReference=SOT-23-OT5, PackageVersion="revBB, Aug-2009", RevisionNote="URLs added."
U9 U10: library part AMP-OPA-MCP6001-SOT5, "1 MHz, Low-Power Operational Amplifier, 5-Pin SOT-23, Industrial Temperature, Tape and Reel", Code_IPC=SOT23-5, ComponentLink1Description="Manufacturer URL", ComponentLink1URL=http://www.microchip.com/, ComponentLink2Description=Datasheet, ComponentLink2URL=http://ww1.microchip.com/downloads/en/DeviceDoc/21733j.pdf, ComponentLink3Description="Package Specification", ComponentLink3URL=http://www.microchip.com/stellent/groups/techpub_sg/documents/packagingspec/en012702.pdf, DatasheetVersion="revJ, Nov-2009", PackageDescription="5-Lead Plastic Small Outline Transistor (OT) [SOT-23]", PackageReference=SOT-23-OT5, PackageVersion="revBB, Aug-2009", RevisionNote="URLs added."
U12: library part CMP-0315-00046-3, "CAN Bus Transceiver, 3.3 V, -40 to 85 degC, 8-Pin SOIC (D), Green (RoHS & no Sb/Br), Tube", Generic Part Number=SN65HVD230, Supply Voltage Max="3.6 V", Supply Voltage Min="3 V", Temperature Max="85 degC", Temperature Min="-40 degC", ComponentLink1Description="Manufacturer URL", ComponentLink1URL=http://www.ti.com/, ComponentLink2Description=Datasheet, ComponentLink2URL="http://www.ti.com/general/docs/lit/getliterature.tsp?genericGeneric Part Number=SN65HVD230&fileType=pdf", DatasheetVersion=SLOS346N, Mounting Technology="Surface Mount", PackageDescription="8-Pin Plastic Small Outline, Body 4.9 x 3.9 mm, Pitch 1.27 mm", Packing=Tube, PartNumber=SN65HVD230D, RoHS=TRUE
U13: library part CMP-0323-00320-3, "Buck Step Down Regulator with 3 to 17 V Input and 5 V Output, -40 to 85 degC, 8-Pin WSON (DSG), Green (RoHS & no Sb/Br)", Manufacturer="Texas Instruments", Rating=Catalog, Switch Current Limit(Typ)(A)=1.05, Code_JEDEC=MO-229, ComponentLink1Description=Datasheet, ComponentLink1URL=http://www.ti.com/general/docs/lit/getliterature.tsp?genericPartNumber=TPS62173&fileType=pdf, ComponentLink2Description="Package Specification", ComponentLink2URL=http://www.ti.com/litv/pdf/mpds308a, ComponentLink3Description="URL Link1", ComponentLink3URL="Samples URL:http://www.ti.com/product/tps62173#samples", DatasheetVersion=SLVSAT8A, Duty Cycle(Max)(%)=100, Eco-Plan="Green (RoHS & no Sb/Br)", Iout(Max)(A)=0.5, Iq(Typ)(mA)=0.017, Mounting Technology="Surface Mount", PackageDescription="8-Pin Plastic Small Outline No-Lead, 2 x 2 x 0.8 mm Body, 0.5 mm Pitch, Exposed Pad", PackageReference=DSG0008A, PackageVersion="revB, Oct-2010", PartNumber=TPS62173DSGR, Preset Vout(V)=5, Regulated Outputs(#)=1, SubFamily="Step-Down Regulator", Synchronous Rectification=TRUE, Topology=Buck, Vin(Max)(V)=17, Vin(Min)(V)=3, Vout(Max)(V)=5, Vout(Min)(V)=5
U14: library part CMP-0136-00852-1, "250 mA Low Quiescent Current LDO Regulator, 3-Pin SOT-89, Extended Temperature, Tape and Reel", Code_IPC=SOT89, DatasheetVersion="revD, Jun-2009", PackageDescription="3-Lead Plastic Small Outline Transistor Header (MB) [SOT-89]", PackageReference=SOT-89-MB3, PackageVersion="revBB, Aug-2009"

## Via types
v1: diameter 1.27, hole 0.711, Top Layer to Bottom Layer, 79 vias
v2: diameter 1.8, hole 1.2, Top Layer to Bottom Layer, 5 vias
v3: diameter 0.5, hole 0.2, Top Layer to Bottom Layer, 2 vias

## Nets (pads, with @x,y where several pads share a name; then routed paths per layer and width w, separated by ;. In a path a pad name is that pad's centre, name@x,y a point inside that pad or via, vN(x,y) a via of type N, cw(c..) or ccw(c..) an arc to the next point about the centre after c; other vN are vias at no path point)
+3: C21.1 C22.1 C25.1 C26.1 C32.1 C34.2 P3.28 P3.29 P3.30 P3.32 P3.33 U6.1 U6.8 U7.1 U7.8 U12.3 U14.3 | length 153.8
  Top Layer w0.254: C34.2@97.57,71.879 99.543,71.879 100.182,71.24 U14.3@102.18,71.24 102.18,69.422 v1(102.184,69.418) ; C25.1@109.57,37.869 109.57,37.208 110.454,37.208 110.792,36.87 U6.1@112.4,36.87 113.142,36.87 113.436,36.576 113.436,26.59 112.776,25.929 C26.1@108.93,25.929 108.93,24.98 U7.1@111.87,24.98 113.044,24.98 114.82,23.204 114.82,22.13 115.87,21.08 U7.8@117.77,21.08 118.872,21.08 119.405,21.613 119.405,22.352 119.974,22.921 C22.1@121.15,22.921 121.15,26.83 119.456,28.524 119.456,32.64 119.126,32.97 ; v1(115.431,63.068) 115.529,63.068 116.447,63.987 C32.1@116.447,65.526 117.321,65.526 119.609,67.813 U12.3@121.325,67.813 ; U6.8@118.3,32.97 119.126,32.97 ; P3.33@135.605,56.62 130.023,51.037 130.023,38.608 128.051,36.636 125.678,36.636 125.363,36.322 125.363,35.728 122.476,32.841 C21.1@121.41,32.841 119.916,32.841 119.786,32.97 119.126,32.97 ; P3.28@137.51,50.27 P3.30@137.51,52.81 P3.32@137.51,55.35
  Bottom Layer w0.254: v1(102.184,69.418) 108.534,63.068 v1(115.431,63.068) 114.833,62.47 114.833,56.286 117.907,53.213 120.498,53.213 123.904,56.62 P3.33@135.605,56.62 136.421,55.804 136.421,55.626 136.697,55.35 P3.32@137.51,55.35 ; P3.29@135.605,51.54 136.875,52.81 P3.30@137.51,52.81
+5: C23.1 C24.1 C27.1 C28.1 C29.2 C30.1 C31.1 C35.2 L1.2 P2.3 P3.63 P3.64 P3.65 P3.67 R11.1 U6.14 U7.14 U8.5 U9.5 U10.5 U11.5 U13.6 U14.2 | length 304.3
  Top Layer w0.28: 91.948,90.053 U13.6@92.758,90.053
  Top Layer w0.45: 116.641,37.577 117.348,36.87 U6.14@118.3,36.87 119.09,36.87 119.304,37.084 ; C24.1@117.531,27.67 117.531,24.98 U7.14@117.77,24.98 ; v1(119.304,54.813) 119.304,37.084 ; 122.268,40.049 119.304,37.084
  Top Layer w0.5: P2.3@56.678,75.441 55.448,76.671 55.448,78.994 55.702,79.248 62.154,79.248 69.566,71.835 69.566,51.431 ; U10.5@72.012,47.18 71.882,47.18 71.882,48.493 71.12,49.255 70.307,49.255 70.307,49.886 69.566,49.886 C29.2@69.566,50.483 69.566,51.431 ; U11.5@76.761,47.12 76.761,48.641 76.551,48.85 C30.1@76.551,50.38 76.551,51.562 ; 91.948,90.053 91.262,90.739 91.262,92.62 C31.1@89.7,92.62 87.376,92.62 86.34,91.584 L1.2@86.34,88.72 86.34,86.394 88.99,83.744 R11.1@88.99,82.4 88.99,64.157 ; C27.1@99.061,50.38 99.061,48.248 U8.5@99.639,47.67 100.553,47.67 101.168,48.285 103.226,48.285 104.011,47.5 U9.5@104.569,47.5 104.569,48.819 104.291,49.097 C28.1@104.291,50.46 104.291,57.101 ; U14.2@102.38,72.74 U14.2@104.88,72.74 ; C35.2@105.158,77.547 105.158,75.259 104.88,74.981 U14.2@104.88,72.74 ; C23.1@116.641,39.473 116.641,37.577 116.641,31.797 117.531,30.907 C24.1@117.531,27.67 ; 122.268,40.049 122.268,55.379 120.142,57.506 106.302,57.506 104.88,58.928 104.88,61.879 ; P3.63@139.415,51.54 139.253,51.702 139.253,53.119 139.415,53.281 P3.65@139.415,54.08 P3.67@139.415,56.62 ; 69.566,51.431 69.85,51.714 76.399,51.714 76.551,51.562 ; 76.551,51.562 80.264,55.275 ; 80.264,55.275 80.264,55.431 88.99,64.157 ; 80.264,55.275 80.264,54.102 81.28,53.086 83.033,53.086 88.722,58.776 102.616,58.776 104.291,57.101 ; 80.264,55.275 88.99,64.001 88.99,64.157 ; 104.291,57.101 104.291,61.29 104.88,61.879 ; 104.88,61.879 U14.2@104.88,72.74
  Bottom Layer w0.5: v1(119.304,54.813) 122.235,57.745 136.071,57.745 136.561,57.255 136.561,57.248 137.189,56.62 P3.67@139.415,56.62 ; P3.63@139.415,51.54 140.685,52.81 P3.64@141.32,52.81
+12: C1.1 C2.1 C3.1 C4.1 C5.1 C6.1 C7.1 C8.1 C9.1 C10.1 C11.1 C12.1 C13.1 C14.1 C15.1 C16.1 C17.1 C18.1 C19.1 C20.1 C33.1 J1.2 U1.1 U1.7 U1.8 U1.14 U2.1 U2.7 U2.8 U2.14 U3.1 U3.7 U3.8 U3.14 U4.1 U4.7 U4.8 U4.14 U5.1 U5.7 U5.8 U5.14 U13.2 U13.3 | length 334.9
  Top Layer w0.28: U13.3@94.658,90.053 U13.2@94.658,89.553 95.783,89.553
  Top Layer w0.5: C1.1@64.35,13.491 65.684,13.491 66.634,12.542 U1.1@67.97,12.542 68.804,12.542 69.593,13.331 71.132,13.331 72.136,12.542 ; C3.1@64.39,2.69 65.256,2.69 67.488,4.922 U1.7@67.97,4.922 69.717,4.922 ; C2.1@73.031,15.62 73.031,14.184 73.27,13.945 U1.14@73.27,12.542 ; U2.1@82.044,12.542 80.531,12.542 79.832,13.241 C5.1@78.35,13.241 74.801,13.241 74.102,12.542 U1.14@73.27,12.542 ; C7.1@87.271,15.22 87.271,12.976 ; U2.14@87.344,12.542 87.271,12.542 87.271,12.976 ; C9.1@92.76,13.371 94.005,13.371 94.835,12.542 U3.1@96.119,12.542 100.527,12.542 ; 95.783,89.553 97.12,90.89 C33.1@99.63,90.89 138.929,90.89 ; C11.1@101.381,15.24 101.381,13.906 101.419,13.868 U3.14@101.419,12.542 100.527,12.542 ; C13.1@107.06,13.501 108.128,13.501 109.087,12.542 U4.1@110.193,12.542 U4.14@115.493,12.542 115.493,13.741 115.261,13.974 C15.1@115.261,15.22 ; C17.1@121.25,13.421 122.301,13.421 123.18,12.542 U5.1@124.267,12.542 U5.14@129.567,12.542 129.567,13.792 129.411,13.949 C19.1@129.411,15.24 ; C18.1@121.43,2.919 120.576,2.919 ; C20.1@130.101,2.4 130.101,3.378 129.567,3.912 U5.8@129.567,4.922 ; v2(139.02,84.81) 140.386,86.176 140.386,89.433 138.929,90.89 ; 69.717,4.922 71.763,6.968 71.763,12.169 72.136,12.542 ; 69.717,4.922 U1.8@73.27,4.922 73.27,3.667 73.661,3.277 C4.1@73.661,2.03 76.124,2.03 76.551,2.458 78.959,2.458 78.959,2.619 C6.1@79.18,2.619 80.264,2.619 80.899,3.254 80.899,4.572 81.249,4.922 U2.7@82.044,4.922 86.36,4.922 ; 72.136,12.542 U1.14@73.27,12.542 ; 86.36,4.922 U2.8@87.344,4.922 87.344,3.891 88.061,3.175 C8.1@88.061,2.18 90.475,2.18 91.014,2.719 C10.1@93.44,2.719 94.489,2.719 94.818,3.048 94.818,4.572 95.168,4.922 U3.7@96.119,4.922 100.584,4.922 ; 86.36,4.922 86.106,5.176 86.106,11.811 87.271,12.976 ; 100.527,12.542 100.178,12.192 100.178,5.328 100.584,4.922 ; 100.584,4.922 U3.8@101.419,4.922 101.419,3.994 102.441,2.972 C12.1@102.441,2.09 104.47,2.09 105.229,2.849 C14.1@107.28,2.849 108.331,2.849 108.331,3.525 109.728,4.922 U4.7@110.193,4.922 U4.8@115.493,4.922 115.493,3.819 116.061,3.251 C16.1@116.061,2.19 118.364,2.19 119.093,2.919 120.576,2.919 ; 120.576,2.919 120.193,3.302 120.193,5.842 120.498,6.147 122.377,6.147 123.602,4.922 U5.7@124.267,4.922 U5.8@129.567,4.922 ; U5.8@129.567,4.922 133.993,4.922 135.31,6.239 135.31,8.888 137.884,11.463 143.339,11.463 145.593,13.716 145.593,85.683 140.386,90.89 138.929,90.89
  Bottom Layer w0.5: v1(115.45,14.062) 121.168,14.062 v1(121.23,14)
CAN_HIGH: J1.4 R9.1 U12.7 | length 55.5
  Top Layer w0.254: R9.1@126.245,60.26 125.984,62.357 118.18,62.357 117.393,61.57 117.393,59.944 116.842,59.393 115.404,59.393 114.853,59.944 114.853,60.96 119.425,65.532 122.326,65.532 125.878,69.083 U12.7@126.975,69.083 127.884,69.083 129.972,71.171 129.972,82.833 v2(135.484,88.346)
CAN_LOW: H1.2 J1.5 U12.6 | length 40.1
  Top Layer w0.254: H1.2@115.93,60.47 116.939,61.479 116.939,62.103 119.837,65 122.531,65 125.344,67.813 U12.6@126.975,67.813 129.561,67.813 133.629,71.882 133.629,84.811 135.397,86.578 v2(137.252,86.578)
CAN_RX: P2.20 U12.4 | length 90.5
  Top Layer w0.254: v1(119.786,66.523) 119.807,66.543 U12.4@121.325,66.543
  Bottom Layer w0.254: P2.20@54.138,55.121 50.902,55.121 50.543,54.762 48.743,54.762 48.387,55.118 48.387,61.239 53.848,66.7 89.078,66.7 92.761,70.383 115.926,70.383 v1(119.786,66.523)
CAN_TX: P2.19 U12.1 | length 87.8
  Top Layer w0.254: v1(81.664,55.121) 92.532,65.989 92.532,74.447 98.019,79.934 116.84,79.934 117.907,78.867 117.907,72.136 119.69,70.353 U12.1@121.325,70.353
  Bottom Layer w0.254: P2.19@56.678,55.121 v1(81.664,55.121)